# EAGLE board Preamp2 (EAGLE 5.07)
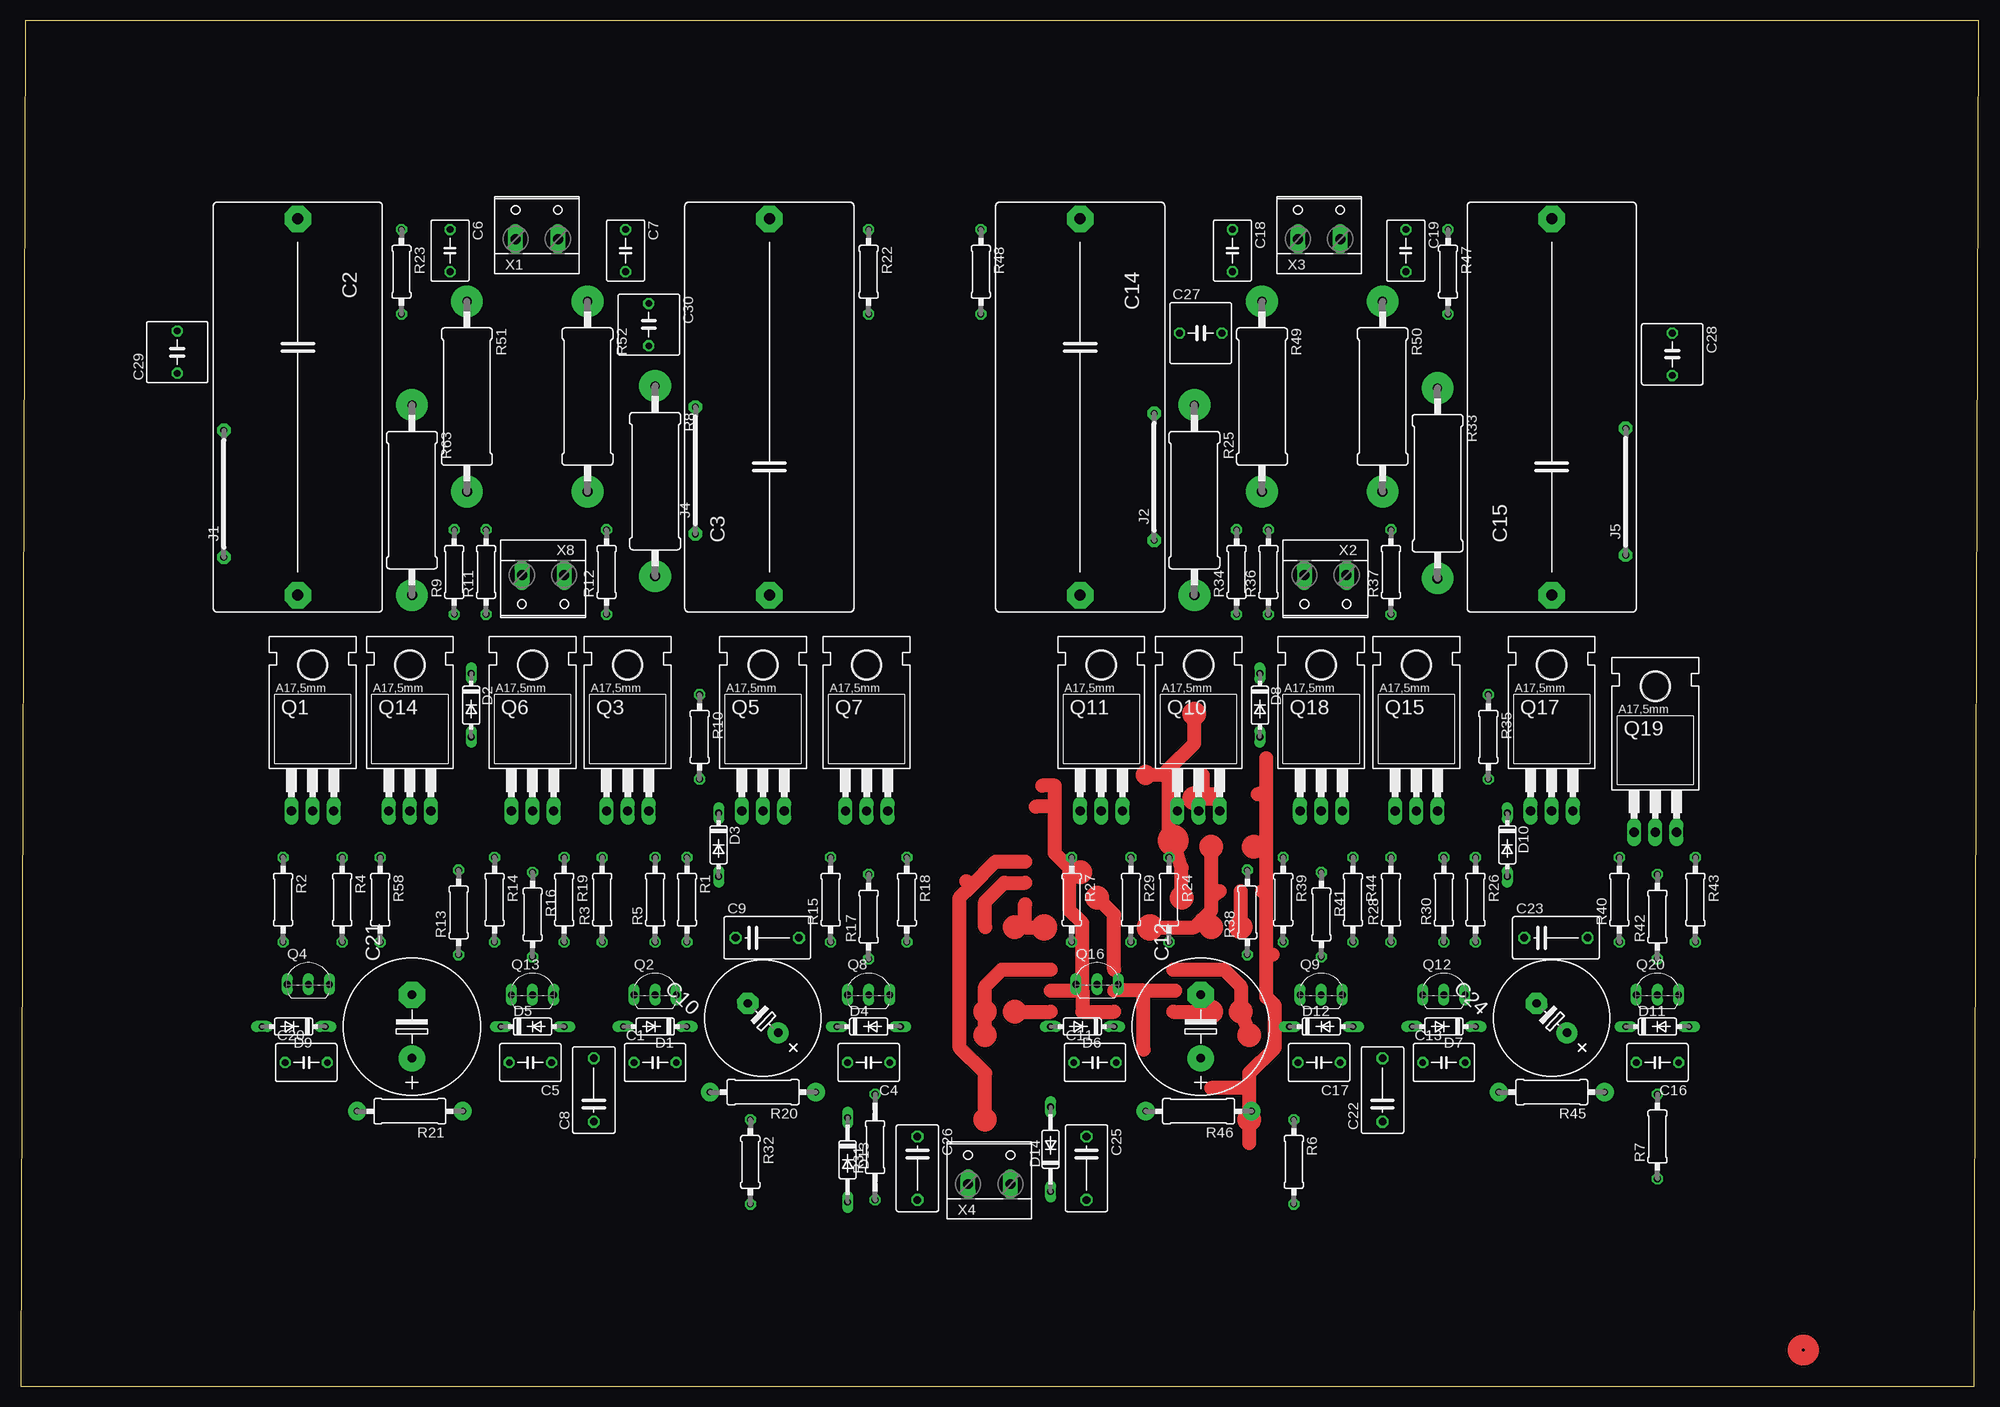
[diagram p0: board, top side]
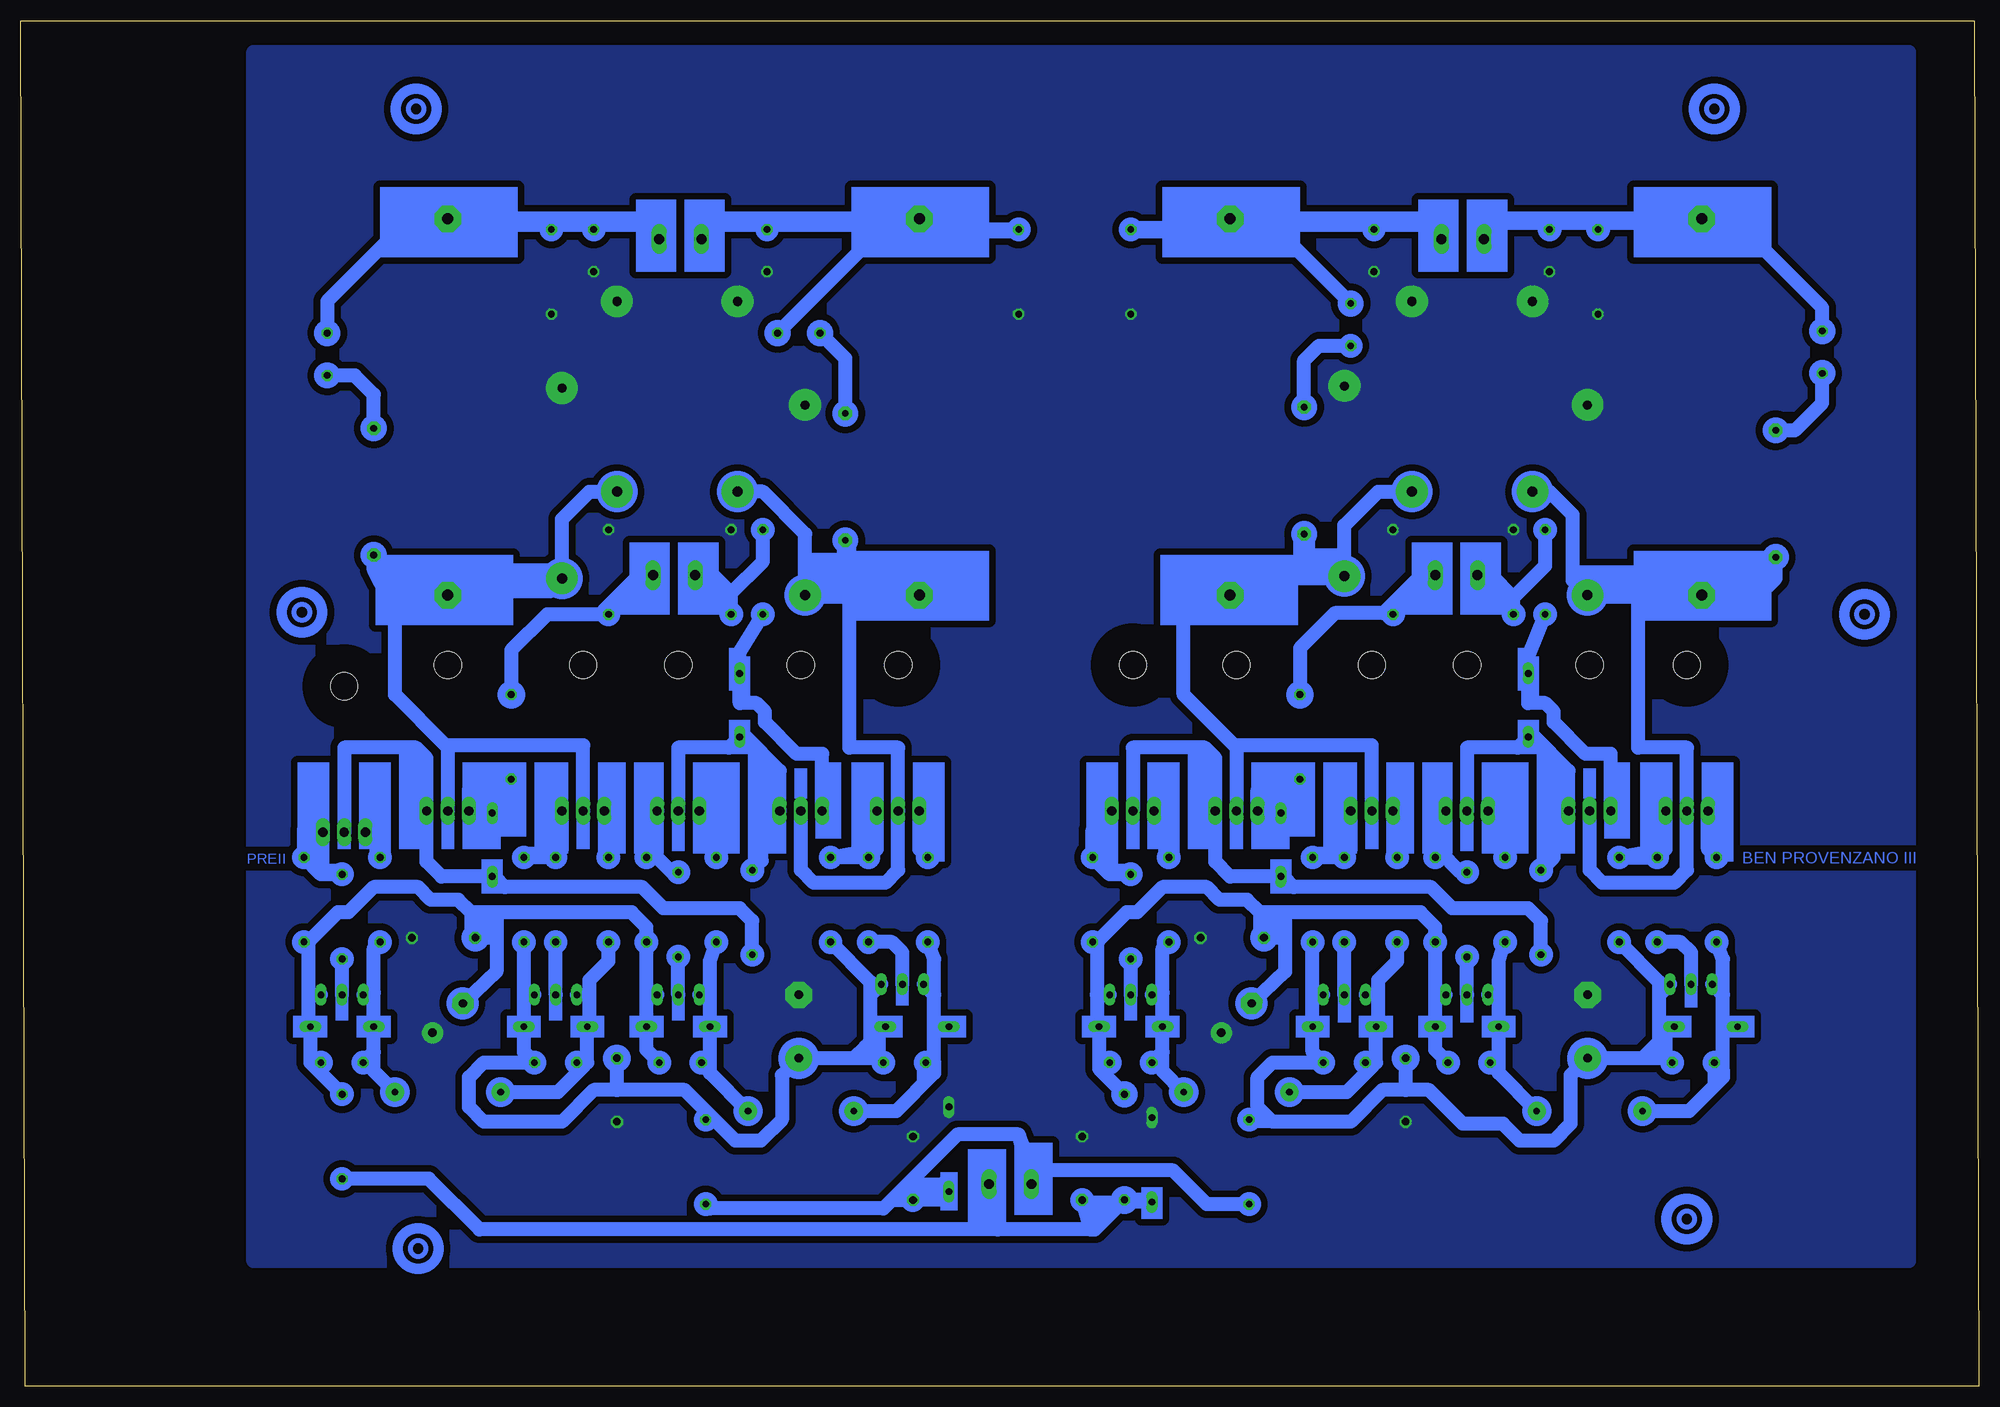
[diagram p1: board, bottom side, seen from below]

Size 235.18 x 164.01 mm. Coordinates in mm from the lower left corner, seen from the top.
Outline: 0,0 234.68,0 235.18,164.01 0.51,164.01 0,0
Copper layers (1*16): Top 0.035mm / dielectric 1.5mm / Bottom 0.035mm
Design rules "default *": minimum track width 10mil, minimum drill 24mil, track to track 8mil, track to pad 8mil, pad to pad 8mil, via to via 8mil, smd to smd 8mil, copper to edge 40mil, drill to drill 8mil, minimum pad ring 10mil, minimum via ring 8mil, stop-mask expansion 4mil, vias tented up to drill 0mil, thermal gap 10mil

## Footprints (pad centres in the part's own frame; a part is rotated, then mirrored left to right if it is on the bottom)
C050-045X075 = drill 0.813 octagon: 1 -2.54,0; 2 2.54,0
C37.5B20 = drill 1.321 pad 3.15 octagon: 1 -22.606,0; 2 22.606,0
C075-052X106 = drill 0.914 octagon: 1 -3.81,0; 2 3.81,0
E5-13 = drill 1.016 pad 2.54 round: + -2.54,0 | drill 1.016 pad 2.54 octagon: - 2.54,0
E7,5-16 = drill 1.016 pad 3.15 round: + -3.81,0 | drill 1.016 pad 3.15 octagon: - 3.81,0
C050-075X075 = drill 0.813 octagon: 1 -2.54,0; 2 2.54,0
DO35-7 = drill 0.813 long: A 3.81,0; C -3.81,0
DO35-10 = drill 0.813 long: A 5.08,0; C -5.08,0
15 = drill 0.813 pad 1.6 octagon: 1 -7.62,0; 2 7.62,0
TO220BH = drill 1.118 long: D 0,-6.35; G -2.54,-6.35; S 2.54,-6.35 | hole 3.302: 0,11.176
TO92-EBC = drill 0.813 long: B 0,-1.27; C -2.54,-1.27; E 2.54,-1.27
0207/10 = drill 0.813 octagon: 1 -5.08,0; 2 5.08,0
0617/22 = drill 1.1 pad 3.81 round: 1 -11.43,0 | drill 1.2 pad 3.81 round: 2 11.43,0
0309/12 = drill 0.8 pad 2.184 round: 1 -6.35,0; 2 6.35,0
0207/12 = drill 0.813 octagon: 1 -6.35,0; 2 6.35,0
W237-132 = drill 1.194 long: 1 -2.54,-0.635; 2 2.54,-0.635

## Placement (x,y rotation side)
C1  680pF  [C050-045X075]  76.2,38.86 0 top
C2  11uF  [C37.5B20]  33.27,117.6 270 top
C3  11uF  [C37.5B20]  89.92,117.6 90 top
C4  680pF  [C050-045X075]  101.85,38.86 180 top
C5  680pF  [C050-045X075]  61.21,38.86 180 top
C6  680pF  [C050-045X075]  51.56,136.4 270 top
C7  680pF  [C050-045X075]  72.64,136.4 270 top
C8  .5  [C075-052X106]  68.83,35.56 90 top
C9  .5  [C075-052X106]  89.66,53.85 0 top
C10  100uF  [E5-13]  89.15,44.2 135.9 top
C11  680pF  [C050-045X075]  129.03,38.86 0 top
C12  100uF  [E7,5-16]  141.73,43.18 90 top
C13  680pF  [C050-045X075]  170.94,38.86 0 top
C14  11uF  [C37.5B20]  127.25,117.6 270 top
C15  11uF  [C37.5B20]  183.9,117.6 90 top
C16  680pF  [C050-045X075]  196.6,38.86 180 top
C17  680pF  [C050-045X075]  155.96,38.86 180 top
C18  680pF  [C050-045X075]  145.54,136.4 270 top
C19  680pF  [C050-045X075]  166.37,136.4 270 top
C20  680pF  [C050-045X075]  34.29,38.86 0 top
C21  100uF  [E7,5-16]  46.99,43.18 90 top
C22  .5  [C075-052X106]  163.58,35.56 90 top
C23  .5  [C075-052X106]  184.4,53.85 0 top
C24  100uF  [E5-13]  183.9,44.2 135.9 top
C25  .5  [C075-052X106]  128.02,26.16 270 top
C26  .5  [C075-052X106]  107.7,26.16 270 top
C27  47nF  [C050-075X075]  141.73,126.49 0 top
C28  47nF  [C050-075X075]  198.37,123.95 270 top
C29  47nF  [C050-075X075]  18.8,124.21 90 top
C30  47nF  [C050-075X075]  75.44,127.51 270 top
D1  12V  [DO35-7]  76.2,43.18 180 top
D2  9V1  [DO35-7]  54.1,81.79 270 top
D3  9V1  [DO35-7]  83.82,65.02 270 top
D4  12V  [DO35-7]  101.85,43.18 0 top
D5  12V  [DO35-7]  61.47,43.18 0 top
D6  12V  [DO35-7]  127.51,43.18 180 top
D7  12V  [DO35-7]  170.94,43.18 180 top
D8  9V1  [DO35-7]  148.84,81.79 270 top
D9  12V  [DO35-7]  32.77,43.18 180 top
D10  9V1  [DO35-7]  178.56,65.02 270 top
D11  12V  [DO35-7]  196.6,43.18 0 top
D12  12V  [DO35-7]  156.21,43.18 0 top
D13  4004  [DO35-10]  99.31,27.18 270 top
D14  4004  [DO35-10]  123.7,28.45 90 top
J1  J15MM  [15]  24.38,107.19 90 top
J2  J15MM  [15]  136.14,109.22 90 top
J4  J15MM  [15]  81.03,109.98 90 top
J5  J15MM  [15]  192.79,107.44 90 top
Q1  PMOS  [TO220BH]  35.05,75.44 0 top
Q2  BC556B  [TO92-EBC]  76.2,48.26 0 top
Q3  PMOS  [TO220BH]  72.9,75.44 0 top
Q4  BC556B  [TO92-EBC]  34.54,49.53 0 top
Q5  NMOS  [TO220BH]  89.15,75.44 0 top
Q6  NMOS  [TO220BH]  61.47,75.44 0 top
Q7  NMOS  [TO220BH]  101.6,75.44 0 top
Q8  BC546B  [TO92-EBC]  101.85,48.26 0 top
Q9  BC546B  [TO92-EBC]  156.21,48.26 0 top
Q10  NMOS  [TO220BH]  141.48,75.44 0 top
Q11  PMOS  [TO220BH]  129.79,75.44 0 top
Q12  BC556B  [TO92-EBC]  170.94,48.26 0 top
Q13  BC546B  [TO92-EBC]  61.47,48.26 0 top
Q14  NMOS  [TO220BH]  46.74,75.44 0 top
Q15  PMOS  [TO220BH]  167.64,75.44 0 top
Q16  BC556B  [TO92-EBC]  129.29,49.53 0 top
Q17  NMOS  [TO220BH]  183.9,75.44 0 top
Q18  NMOS  [TO220BH]  156.21,75.44 0 top
Q19  NMOS  [TO220BH]  196.34,72.9 0 top
Q20  BC546B  [TO92-EBC]  196.6,48.26 0 top
R1  14  [0207/10]  80.01,58.42 270 top
R2  221  [0207/10]  31.5,58.42 270 top
R3  221  [0207/10]  69.85,58.42 90 top
R4  221  [0207/10]  38.61,58.42 270 top
R5  221  [0207/10]  76.2,58.42 90 top
R6  5R1  [0207/10]  152.91,26.92 270 top
R7  5R1  [0207/10]  196.6,29.97 90 top
R8  4K5  [0617/22]  76.2,108.71 270 top
R9  221  [0207/10]  52.07,97.79 90 top
R10  221  [0207/10]  81.53,77.98 270 top
R11  25K  [0207/10]  55.88,97.79 90 top
R12  25K  [0207/10]  70.36,97.79 90 top
R13  1K5  [0207/10]  52.58,56.9 90 top
R14  221  [0207/10]  56.9,58.42 270 top
R15  221  [0207/10]  97.28,58.42 90 top
R16  221  [0207/10]  61.47,56.64 270 top
R17  221  [0207/10]  101.85,56.39 90 top
R18  22R1  [0207/10]  106.43,58.42 270 top
R19  22R1  [0207/10]  65.28,58.42 270 top
R20  22K  [0309/12]  89.15,35.31 180 top
R21  22K  [0309/12]  46.74,33.02 180 top
R22  22K1  [0207/10]  101.85,133.86 270 top
R23  22K1  [0207/10]  45.72,133.86 270 top
R24  14  [0207/10]  137.92,58.42 270 top
R25  4K5  [0617/22]  140.97,106.43 270 top
R26  14  [0207/10]  174.75,58.42 270 top
R27  221  [0207/10]  126.24,58.42 270 top
R28  221  [0207/10]  164.59,58.42 90 top
R29  221  [0207/10]  133.35,58.42 270 top
R30  221  [0207/10]  170.94,58.42 90 top
R31  5R1  [0207/12]  102.62,28.7 90 top
R32  5R1  [0207/10]  87.63,26.92 270 top
R33  4K5  [0617/22]  170.18,108.46 270 top
R34  221  [0207/10]  146.05,97.79 90 top
R35  221  [0207/10]  176.28,77.98 270 top
R36  25K  [0207/10]  149.86,97.79 90 top
R37  25K  [0207/10]  164.59,97.79 90 top
R38  1K5  [0207/10]  147.32,56.9 90 top
R39  221  [0207/10]  151.64,58.42 270 top
R40  221  [0207/10]  192.02,58.42 90 top
R41  221  [0207/10]  156.21,56.64 270 top
R42  221  [0207/10]  196.6,56.39 90 top
R43  22R1  [0207/10]  201.17,58.42 270 top
R44  22R1  [0207/10]  160.02,58.42 270 top
R45  22K  [0309/12]  183.9,35.31 180 top
R46  22K  [0309/12]  141.48,33.02 180 top
R47  22K1  [0207/10]  171.45,133.86 270 top
R48  22K1  [0207/10]  115.32,133.86 270 top
R49  4K5  [0617/22]  149.1,118.87 270 top
R50  4K5  [0617/22]  163.58,118.87 270 top
R51  4K5  [0617/22]  53.59,118.87 270 top
R52  4K5  [0617/22]  68.07,118.87 270 top
R58  14  [0207/10]  43.18,58.42 270 top
R63  4K5  [0617/22]  46.99,106.43 270 top
X1  [W237-132]  61.98,138.43 0 top
X2  [W237-132]  156.72,96.77 180 top
X3  [W237-132]  155.96,138.43 0 top
X4  [W237-132]  116.33,24.89 0 top
X8  [W237-132]  62.74,96.77 180 top

## Library data of the parts
C1 C4-C13 C16-C30 R1-R52 R58 R63 = resistor
C2 C3 C14 C15 = capacitor-wima
D1-D14 = diode
J1 J2 J4 J5 = jumper
Q1 Q3 Q5-Q7 Q10 Q11 Q14 Q15 Q17-Q19 = transistor-power
Q2 Q4 Q12 Q16 = transistor-pnp
Q8 Q9 Q13 Q20 = transistor-npn
X1-X4 X8 = con-wago-508

## Nets
GND: C6.2 C7.2 C8.1 C9.2 C10.+ C12.- C18.2 C19.2 C21.- C22.1 C23.2 C24.+ C25.1 C26.1 D13.C D14.A R8.1 R11.2 R12.2 R22.2 R23.2 R25.1 R33.1 R36.2 R37.2 R47.2 R48.2 R49.1 R50.1 R51.1 R52.1 R63.1
N$1: Q1.S R4.1 R58.1
N$2: Q3.S R1.1 R5.2
N$3: C1.2 C8.2 C20.2 C21.+ D1.C D9.C Q2.E Q4.E R1.2 R32.1 R58.2
N$4: Q1.G R2.1
N$5: Q3.G R3.2
N$6: Q2.B R5.1
N$7: C1.1 D1.A Q2.C R3.1 R20.2
N$8: Q4.B R4.2
N$9: C20.1 D9.A Q4.C R2.2 R21.2
N$10: R9.2 R11.1 X8.2
N$11: R10.1 R12.1 X8.1
N$12: C29.1 J1.2
N$13: C30.2 J4.2
N$14: D2.C Q14.G R9.1
N$15: D3.C Q5.G R10.2
N$16: D2.A Q6.D Q14.S R13.2
N$17: D3.A Q5.S Q7.D R13.1
N$18: Q6.G R14.1
N$19: Q7.G R15.2
N$20: Q6.S R16.1 R19.1
N$21: Q7.S R17.2 R18.1
N$22: Q13.B R16.2
N$23: C5.2 D5.C Q13.C R14.2 R21.1
N$24: Q8.B R17.1
N$25: C4.2 D4.C Q8.C R15.1 R20.1
N$26: C4.1 C5.1 C9.1 C10.- D4.A D5.A Q8.E Q13.E R18.2 R19.2 R31.2
N$27: C3.2 C7.1 C30.1 R22.1 X1.2
N$28: C2.1 C6.1 C29.2 R23.1 X1.1
N$29: Q11.S R24.1 R29.1
N$30: Q15.S R26.1 R30.2
N$31: C11.2 C12.+ C13.2 C22.2 D6.C D7.C Q12.E Q16.E R6.1 R24.2 R26.2
N$32: Q11.G R27.1
N$42: Q15.G R28.2
N$43: Q12.B R30.1
N$44: C13.1 D7.A Q12.C R28.1 R45.2
N$45: Q16.B R29.2
N$52: C11.1 D6.A Q16.C R27.2 R46.2
N$53: C14.2 J2.1 Q10.D Q11.D R25.2 R49.2
N$54: C15.1 J5.1 Q15.D Q17.D R33.2 R50.2
N$55: D8.C Q10.G R34.1
N$56: D10.C Q17.G R35.2
N$57: R34.2 R36.1 X2.2
N$58: R35.1 R37.1 X2.1
N$59: D8.A Q10.S Q18.D R38.2
N$60: D10.A Q17.S Q19.D R38.1
N$61: Q18.G R39.1
N$62: Q19.G R40.2
N$63: Q18.S R41.1 R44.1
N$64: Q19.S R42.2 R43.1
N$65: Q9.B R41.2
N$66: C17.2 D12.C Q9.C R39.2 R46.1
N$67: Q20.B R42.1
N$68: C16.2 D11.C Q20.C R40.1 R45.1
N$69: C16.1 C17.1 C23.1 C24.- D11.A D12.A Q9.E Q20.E R7.2 R43.2 R44.2
N$70: C15.2 C19.1 C28.1 R47.1 X3.2
N$71: C14.1 C18.1 C27.2 R48.1 X3.1
N$72: C25.2 D14.C R6.2 R32.2 X4.1
N$73: C26.2 D13.A R7.1 R31.1 X4.2
N$74: C2.2 J1.1 Q1.D Q14.D R51.2 R63.2
N$75: C3.1 J4.1 Q3.D Q5.D R8.2 R52.2
N$78: C27.1 J2.2
N$79: C28.2 J5.2

## Tracks (layer width: path | path; a pad name or v marks a point on that pad's centre or on a via)
GND
  pour Bottom (isolate 0.813, no thermals): 8.38,160.27 8.38,14.99 207.26,14.99 207.26,160.27
N$1
  Bottom 1.676: Q1.S 37.59,64.52 R58.1 R4.1
N$2
  Bottom 1.676: 76.45,63.5 R5.2 | 76.45,63.5 R1.1 | 76.45,63.5 75.44,64.52 Q3.S
N$3
  Bottom 1.676: 80.01,46.99 D1.C 80.01,40.13 79.25,39.37 | 80.01,46.99 R1.2 | 80.01,46.99 Q2.E | 79.25,39.37 C1.2 | 86.11,33.02 84.84,31.75 75.44,31.75 71.63,35.56 68.83,35.56 | 86.11,33.02 86.61,33.53 86.61,37.08 84.84,38.86 79.76,38.86 79.25,39.37 | R58.2 38.35,48.51 38.35,46.99 | 38.35,46.99 Q4.E | 38.35,41.4 40.39,39.37 C21.+ 49.02,37.34 49.02,31.5 51.05,29.46 55.12,29.46 57.15,31.5 61.98,31.5 66.04,35.56 68.83,35.56 | 38.35,41.4 38.35,42.67 38.35,43.18 | 38.35,43.18 38.35,46.99 | 38.35,43.18 D9.C | 68.83,35.56 C8.2 | C20.2 37.08,38.61 38.35,39.88 38.35,41.4 | R32.1 86.61,33.02 86.11,33.02
N$4
  Bottom 1.676: R2.1 32.51,64.52 Q1.G
N$5
  Bottom 1.676: R3.2 Q3.G
N$6
  Bottom 1.676: Q2.B R5.1
N$7
  Bottom 1.676: 72.14,46.99 72.14,43.43 D1.A 72.39,38.86 73.03,38.23 | 69.6,53.34 R3.1 69.85,51.05 72.14,48.77 72.14,46.99 | 72.14,46.99 Q2.C | R20.2 75.95,35.31 73.03,38.23 | 73.03,38.23 C1.1
N$8
  Bottom 1.676: R4.2 35.81,53.34 34.54,52.07 Q4.B
N$9
  Bottom 1.676: R2.2 30.73,51.31 30.73,46.99 | 30.73,46.99 Q4.C | 30.73,43.18 30.73,46.99 | 30.73,43.18 D9.A | 30.73,37.85 30.73,43.18 | R21.2 34.8,33.02 30.73,37.08 30.73,37.59 30.73,37.85 | 30.73,37.85 C20.1
N$10
  Bottom 1.676: R9.2 52.07,98.55 55.88,94.74 | R11.1 55.88,94.74 | 55.88,94.74 58.55,97.41 X8.2
N$11
  Bottom 1.676: R10.1 81.53,88.65 77.34,92.84 71.5,92.84 | 71.5,92.84 66.8,97.54 64.77,97.54 64.9,97.41 X8.1 | R12.1 71.25,92.84 71.5,92.84
N$12
  Bottom 1.676: J1.2 22.1,114.81 18.8,118.11 C29.1
N$13
  Bottom 1.676: C30.2 79.25,124.97 81.03,123.19 J4.2
N$14
  Bottom 1.676: D2.C 54.1,84.84 | D2.C 54.1,87.63 R9.1 | Q14.G 44.2,75.95 47.24,75.95 51.05,79.76 51.05,81.03 52.07,82.04 54.1,82.04 D2.C
N$15
  Bottom 1.676: R10.2 85.34,72.9 86.61,71.63 Q5.G 85.09,69.09 D3.C
N$16
  Bottom 1.676: Q6.D 61.47,76.71 55.37,76.71 D2.A 53.34,77.98 49.28,73.91 Q14.S 50.29,69.09 51.05,68.33 51.05,63.5 R13.2
N$17
  Bottom 1.676: Q7.D 101.6,76.71 92.96,76.71 91.69,75.44 Q5.S 91.69,62.99 89.92,61.21 D3.A | R13.1 52.58,55.88 54.1,57.4 63.25,57.4 65.79,59.94 82.3,59.94 83.03,60.68 83.64,60.68 | 83.64,60.68 D3.A | 83.64,60.68 83.57,60.45 | D3.A 83.82,60.45 83.57,60.2
N$18
  Bottom 1.676: Q6.G 56.9,67.06 R14.1
N$19
  Bottom 1.676: Q7.G 97.28,67.31 R15.2
N$20
  Bottom 1.676: 65.28,64.01 R19.1 | 65.28,64.01 65.28,68.33 64.52,69.09 Q6.S | R16.1 62.23,61.72 64.77,64.26 65.28,64.01
N$21
  Bottom 1.676: R17.2 104.39,61.47 R18.1 106.43,66.8 Q7.S
N$22
  Bottom 1.676: Q13.B R16.2
N$23
  Bottom 1.676: 57.66,46.99 D5.C 57.66,39.88 | 57.66,46.99 57.66,51.05 R14.2 | 57.66,46.99 Q13.C | 57.66,39.88 C5.2 | R21.1 57.66,37.59 57.66,39.88
N$24
  Bottom 1.676: Q8.B R17.1
N$25
  Bottom 1.676: R15.1 98.04,52.58 98.04,47.24 | 98.04,47.24 D4.C 98.04,40.13 | Q8.C 99.06,47.24 98.04,47.24 | 98.04,40.13 C4.2 | R20.1 98.04,37.85 98.04,40.13
N$26
  Bottom 1.676: 65.28,46.99 D5.A 65.28,40.39 C5.1 | 105.92,46.99 105.92,43.43 D4.A 105.66,38.35 | 105.92,52.58 105.92,46.99 | 105.92,52.58 106.43,53.09 R18.2 106.17,53.09 | 105.92,46.99 Q8.E | 65.28,46.99 Q13.E | 65.28,46.99 R19.2 65.28,55.12 67.06,56.9 83.06,56.9 | C10.- 83.31,49.78 83.31,53.85 | 83.31,53.85 83.31,56.39 83.06,56.64 83.06,56.9 | 83.31,53.85 C9.1 | 83.06,56.9 86.36,56.9 87.88,58.42 91.19,58.42 92.71,59.94 98.04,59.94 101.09,56.9 102.36,56.9 105.92,53.34 105.92,52.58 | 105.66,38.35 105.28,37.97 C4.1 | R31.2 105.66,38.1 105.66,38.35
N$27
  Bottom 1.676: X1.2 66.93,140.21 72.14,140.21 | 72.14,140.21 72.9,140.21 | 72.9,140.21 C3.2 | 72.9,140.21 72.9,139.19 | 72.14,140.21 C7.1 | R22.1 95.76,138.94 94.49,140.21 C3.2 | C30.1 85.6,140.21 C3.2
N$28
  Bottom 1.676: X1.1 57.02,140.21 51.56,140.21 | 51.56,140.21 C6.1 | 45.97,140.21 C2.1 29.46,140.21 18.8,129.54 C29.2 | 45.97,140.21 51.56,140.21 | R23.1 45.97,139.19 45.97,140.21
N$29
  Bottom 1.676: Q11.S 132.33,64.52 R24.1 R29.1
N$30
  Bottom 1.676: R30.2 171.2,63.5 | 171.2,63.5 R26.1 | 171.2,63.5 170.18,64.52 Q15.S
N$31
  Bottom 1.676: 174.75,46.99 D7.C 174.75,40.13 173.99,39.37 | 174.75,46.99 R26.2 | 174.75,46.99 Q12.E | 173.99,39.37 C13.2 | 173.99,39.37 174.5,38.86 179.58,38.86 181.36,37.08 181.36,33.53 179.58,31.75 170.18,31.75 166.37,35.56 163.58,35.56 | R24.2 133.1,48.51 133.1,46.99 | 133.1,46.99 Q16.E | 133.73,40.77 133.1,41.4 133.1,43.18 | 133.73,40.77 135.13,39.37 C12.+ 143.76,37.34 143.76,32 146.3,29.46 149.35,29.46 152.27,32.39 | 133.1,43.18 133.1,46.99 | 133.1,43.18 D6.C | 152.27,32.39 155.45,35.56 163.58,35.56 | 163.58,35.56 C22.2 | C11.2 133.48,40.77 133.73,40.77 | R6.1 152.53,32.39 152.27,32.39
N$32
  Bottom 1.676: R27.1 127.25,64.52 Q11.G
N$33
  Top 1.676: 134.87,47.5 138.68,47.5 | 134.87,47.5 131.32,47.5 | 134.87,40.39 134.87,47.5
N$34
  Top 1.676: 127.51,47.5 127.51,44.96 131.32,44.96 | 127.51,47.5 127.51,55.63 125.98,57.15 125.98,61.72 | 123.7,47.5 127.51,47.5 | 125.98,61.72 125.98,62.23 124.21,64.01 124.21,69.6 | 125.98,61.72 127.25,61.72 | 124.21,69.6 121.92,69.6 | 122.68,72.14 124.21,72.14 124.21,69.6
N$35
  Top 1.676: 139.45,58.67 139.45,62.26 138.43,65.56 137.92,66.07 137.92,74.17 | 140.97,80.77 140.97,77.22 137.92,74.17 | 137.92,74.17 137.16,73.41 135.13,73.41
N$36
  Top 1.676: 147.57,42.16 146.56,44.96 146.56,48.01 144.53,50.04 138.43,50.04
N$37
  Top 1.676: 123.7,50.04 117.86,50.04 115.82,48.01 115.82,42.16
N$38
  Top 1.676: 120.65,55.12 122.94,55.12 | 120.65,55.12 119.38,55.12 | 120.65,55.12 120.65,57.91
N$39
  Top 1.676: 143,58.67 144.02,59.44 | 143,58.67 143,64.77 | 143,58.67 143,57.15 141.86,56.01 | 141.86,56.01 140.97,55.12 135.64,55.12 | 143,55.12 142.11,56.01 141.86,56.01
N$40
  Top 1.676: 120.65,62.99 117.09,62.99 114.17,60.07 | 113.58,60.66 | 114.17,60.07 113.58,60.66 | 114.17,60.07 112.78,58.67 112.78,40.64 115.82,37.59 115.82,32
N$41
  Top 1.676: 149.61,51.82 149.61,46.74 150.62,45.72 150.62,40.64 147.57,37.59 147.57,35.81 | 149.61,51.82 150.39,51.82 | 149.61,51.82 149.61,59.44 | 149.61,59.44 149.1,59.44 | 149.61,59.44 149.61,64.77 | 149.61,64.77 148.08,64.77 | 149.61,64.77 149.61,71.12 | 149.61,71.12 149.61,75.44 | 147.57,35.81 143,35.81 | 147.57,29.21 147.57,35.81 | 149.61,71.12 148.59,71.12
N$42
  Bottom 1.676: R28.2 Q15.G
N$43
  Bottom 1.676: Q12.B R30.1
N$44
  Bottom 1.676: 166.88,46.99 166.88,43.43 D7.A 167.13,38.86 167.77,38.23 | 164.34,53.34 R28.1 164.59,51.05 166.88,48.77 166.88,46.99 | 166.88,46.99 Q12.C | R45.2 170.69,35.31 167.77,38.23 | 167.77,38.23 C13.1
N$45
  Bottom 1.676: R29.2 130.56,53.34 129.29,52.07 Q16.B
N$46
  Top 1.676: 141.94,73.36 141.99,73.32 141.99,70.61 | 141.99,70.61 140.97,70.61 | 141.99,70.61 143.51,70.61 143.51,70.87 143.26,71.12 143.51,71.12
N$47
  Top 1.676: 138.43,44.96 143,44.96
N$48
  Top 1.676: 146.56,55.12 146.56,59.44
N$49
  Top 1.676: 129.29,58.67 131.32,56.64 131.32,50.04
N$50
  Top 1.676: 119.38,44.96 123.7,44.96
N$51
  Top 1.676: 120.65,60.45 118.11,60.45 115.82,58.17 115.82,55.12
N$52
  Bottom 1.676: R27.2 125.48,51.31 125.48,46.99 | 125.48,46.99 Q16.C | 125.48,43.18 125.48,46.99 | 125.48,43.18 D6.A | R46.2 130.05,33.02 125.48,37.59 125.48,38.86 | 125.48,38.86 125.48,43.18 | C11.1 125.48,38.86
N$53
  Bottom 1.676: Q10.D 141.48,61.98 139.95,60.45 131.32,60.45 129.79,61.98 Q11.D 129.79,76.71 135.64,76.71 135.64,95 | R25.2 140.97,102.36 146.05,107.44 R49.2 | J2.1 135.89,99.57 135.89,95
  Bottom 2.184: C14.2 135.64,95 135.89,95 R25.2
N$54
  Bottom 1.676: 183.13,95 182.63,95 | 183.9,76.96 Q17.D | 183.9,76.96 184.15,76.96 190.25,83.06 190.25,95.25 C15.1 191.26,95 192.79,98.04 J5.1 | Q15.D 167.64,76.96 183.9,76.96 | R50.2 166.88,107.44 170.18,104.14 R33.2
  Bottom 2.184: R33.2 171.45,95.76 180.09,95.76 180.85,95 183.13,95 C15.1
N$55
  Bottom 1.676: D8.C 148.84,84.84 | Q10.G 138.94,75.95 141.99,75.95 145.8,79.76 145.8,81.03 146.81,82.04 148.84,82.04 D8.C | R34.1 148.84,88.14 D8.C
N$56
  Bottom 1.676: R35.2 180.09,72.9 181.36,71.63 Q17.G 179.83,69.09 D10.C
N$57
  Bottom 1.676: R34.2 146.05,99.06 149.86,95.25 | R36.1 149.86,95.25 | 149.86,95.25 152.02,97.41 X2.2
N$58
  Bottom 1.676: X2.1 160.91,97.41 165.23,93.09 164.97,93.09 R37.1 171.96,92.71 176.28,88.39 R35.1
N$59
  Bottom 1.676: Q18.D 156.21,76.71 150.11,76.71 D8.A 148.08,77.98 144.02,73.91 Q10.S 146.18,66.93 | 146.18,66.93 146.3,66.8 146.3,66.29 | R38.2 146.18,63.12 146.18,66.93
N$60
  Bottom 1.676: Q19.D 196.34,76.71 187.71,76.71 186.44,75.44 Q17.S 186.44,62.99 184.66,61.21 D10.A | R38.1 147.32,55.88 148.84,57.4 157.99,57.4 160.53,59.94 177.04,59.94 177.77,60.68 178.38,60.68 | 178.38,60.68 D10.A | 178.38,60.68 178.31,60.45 | D10.A 178.56,60.45 178.31,60.2
N$61
  Bottom 1.676: Q18.G 151.64,67.06 R39.1
N$62
  Bottom 1.676: Q19.G 192.02,67.31 R40.2
N$63
  Bottom 1.676: 160.02,64.01 R44.1 | 160.02,64.01 160.02,68.33 159.26,69.09 Q18.S | R41.1 156.97,61.72 159.51,64.26 160.02,64.01
N$64
  Bottom 1.676: R42.2 199.14,61.47 R43.1 201.17,66.8 Q19.S
N$65
  Bottom 1.676: Q9.B R41.2
N$66
  Bottom 1.676: 152.4,46.99 D12.C 152.4,39.88 | 152.4,46.99 152.4,51.05 R39.2 | 152.4,46.99 Q9.C | 152.4,39.88 C17.2 | R46.1 152.4,37.59 152.4,39.88
N$67
  Bottom 1.676: Q20.B R42.1
N$68
  Bottom 1.676: R40.1 192.79,52.58 192.79,47.24 | 192.79,47.24 D11.C 192.79,40.13 | Q20.C 193.8,47.24 192.79,47.24 | 192.79,40.13 C16.2 | R45.1 192.79,37.85 192.79,40.13
N$69
  Bottom 1.676: 160.02,46.99 D12.A 160.02,40.39 C17.1 | 200.66,46.99 200.66,43.43 D11.A 200.41,38.86 200.02,38.48 | 200.66,52.58 200.66,46.99 | 200.66,52.58 201.17,53.09 R43.2 200.91,53.09 | 200.66,46.99 Q20.E | 160.02,46.99 Q9.E | 160.02,46.99 R44.2 160.02,55.12 161.8,56.9 177.8,56.9 | C24.- 178.05,49.78 178.05,53.85 | 178.05,53.85 178.05,56.39 177.8,56.64 177.8,56.9 | 178.05,53.85 C23.1 | 177.8,56.9 181.1,56.9 182.63,58.42 185.93,58.42 187.45,59.94 192.79,59.94 195.83,56.9 197.1,56.9 200.66,53.34 200.66,52.58 | 200.02,38.48 R7.2 | C16.1 199.52,38.48 200.02,38.48
N$70
  Bottom 1.676: X3.2 160.91,140.21 166.37,140.21 | 166.37,140.21 C19.1 | 166.37,140.21 171.45,140.21 | 171.45,140.21 C15.2 188.47,140.21 198.37,130.3 C28.1 | 171.45,140.21 R47.1
N$71
  Bottom 1.676: X3.1 151,140.21 145.54,140.21 | 145.54,140.21 C18.1 | C14.1 145.54,140.21 | R48.1 124.71,138.94 125.98,140.21 C14.1 | C27.2 132.59,138.18 129.29,138.18 C14.1
N$72
  Bottom 1.676: R32.2 92.71,21.84 96.77,25.91 113.54,25.91 115.32,30.23 | 115.32,30.23 122.68,30.23 128.65,24.26 | 115.32,30.23 X4.1 | 128.65,24.26 130.56,22.35 | 130.56,22.35 131.57,21.34 152.4,21.34 R6.2 | 130.56,22.35 C25.2 | D14.C 124.59,24.26 128.65,24.26
N$73
  Bottom 1.676: R7.1 186.18,24.89 180.09,18.8 117.86,18.8 | 106.68,18.8 106.17,18.8 R31.1 99.57,22.35 D13.A | 106.68,18.8 117.86,18.8 | 117.86,18.8 X4.2 | 106.68,18.8 C26.2
N$74
  Bottom 1.676: 33.78,95 34.29,95 | Q14.D 46.74,61.98 45.21,60.45 36.58,60.45 35.05,61.98 Q1.D 35.05,76.71 40.89,76.71 40.89,95 | R63.2 48.77,96.77 48.77,104.65 51.56,107.44 R51.2 | J1.1 24.38,97.03 26.42,95 C2.2
  Bottom 2.184: C2.2 33.78,95 40.89,95 R63.2
N$75
  Bottom 1.676: 88.65,95 C3.1 95.5,95 95.5,83.06 89.41,76.96 89.15,76.96 | 89.15,76.96 Q5.D | Q3.D 72.9,76.96 89.15,76.96 | R52.2 72.14,107.44 76.2,103.38 R8.2 | 81.03,97.28 J4.1
  Bottom 2.184: R8.2 81.03,97.28 89.92,97.28 C3.1
N$78
  Bottom 1.676: C27.1 136.14,123.44 J2.2
N$79
  Bottom 1.676: C28.2 195.07,121.41 192.79,119.13 J5.2
(copper drawn outside any net)
  shapes: Bottom area x180, Bottom circle x187, Top area x3, Top circle x28

## Text on the board
Bottom: BEN PROVENZANO III | PREII